# Altium PCB Flybox2_main_board.PcbDoc
Units mm, origin at the board's own origin, x right, y up, seen from the top; angles counter-clockwise.
Board outline 60 x 64 mm, 2 copper layers (Top Layer, Bottom Layer), stack 1.569 mm thick; 14 components, 38 nets, 116 pads, 1 vias.
Unrouted connection lines stored in the file: 47.
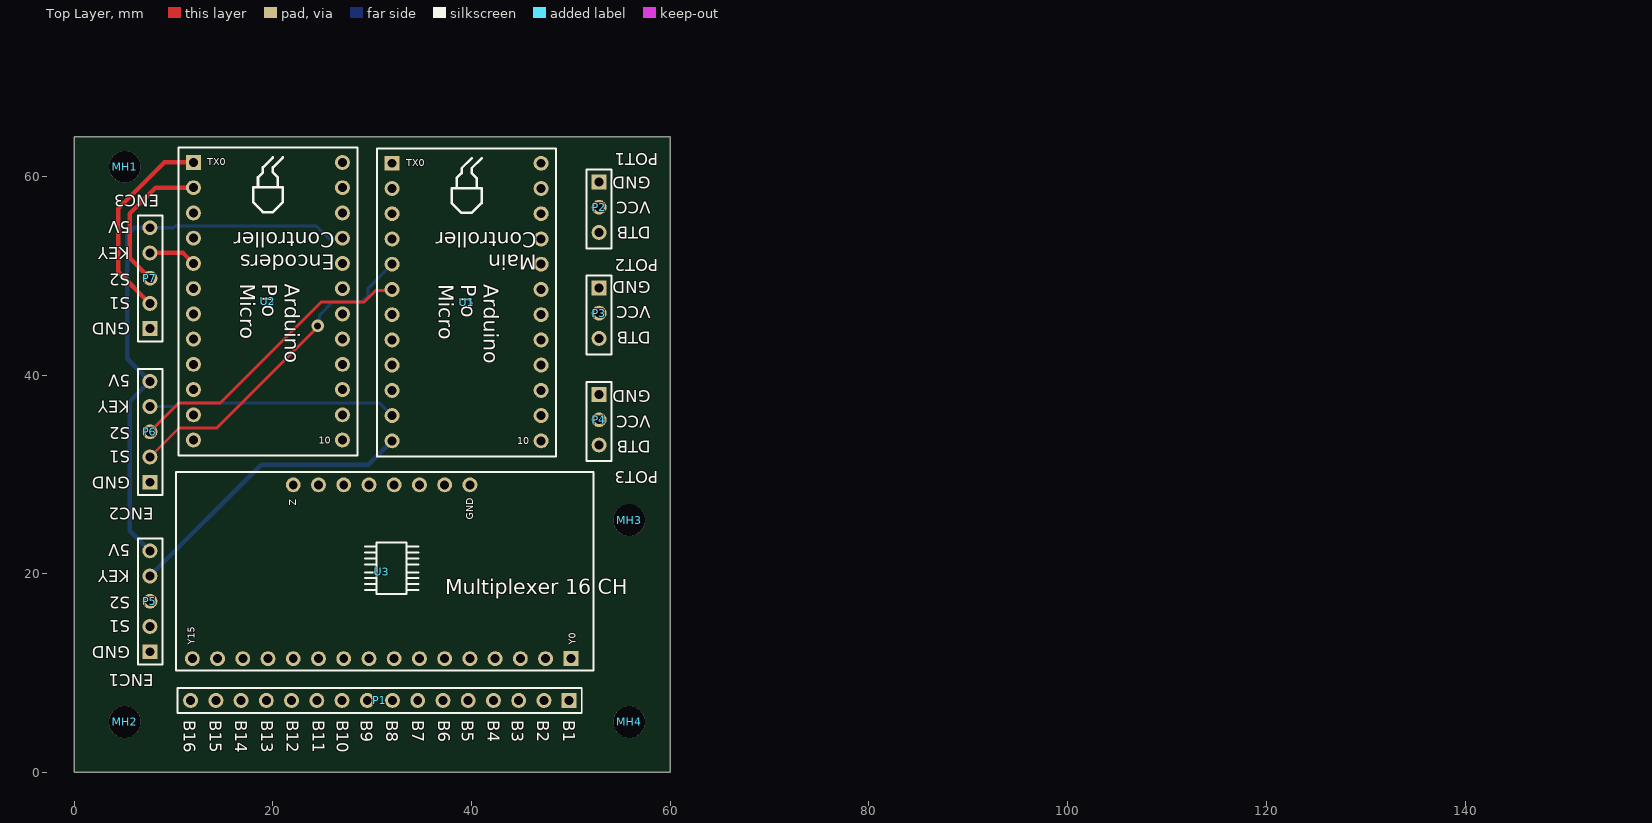
[diagram p0: Top Layer view]
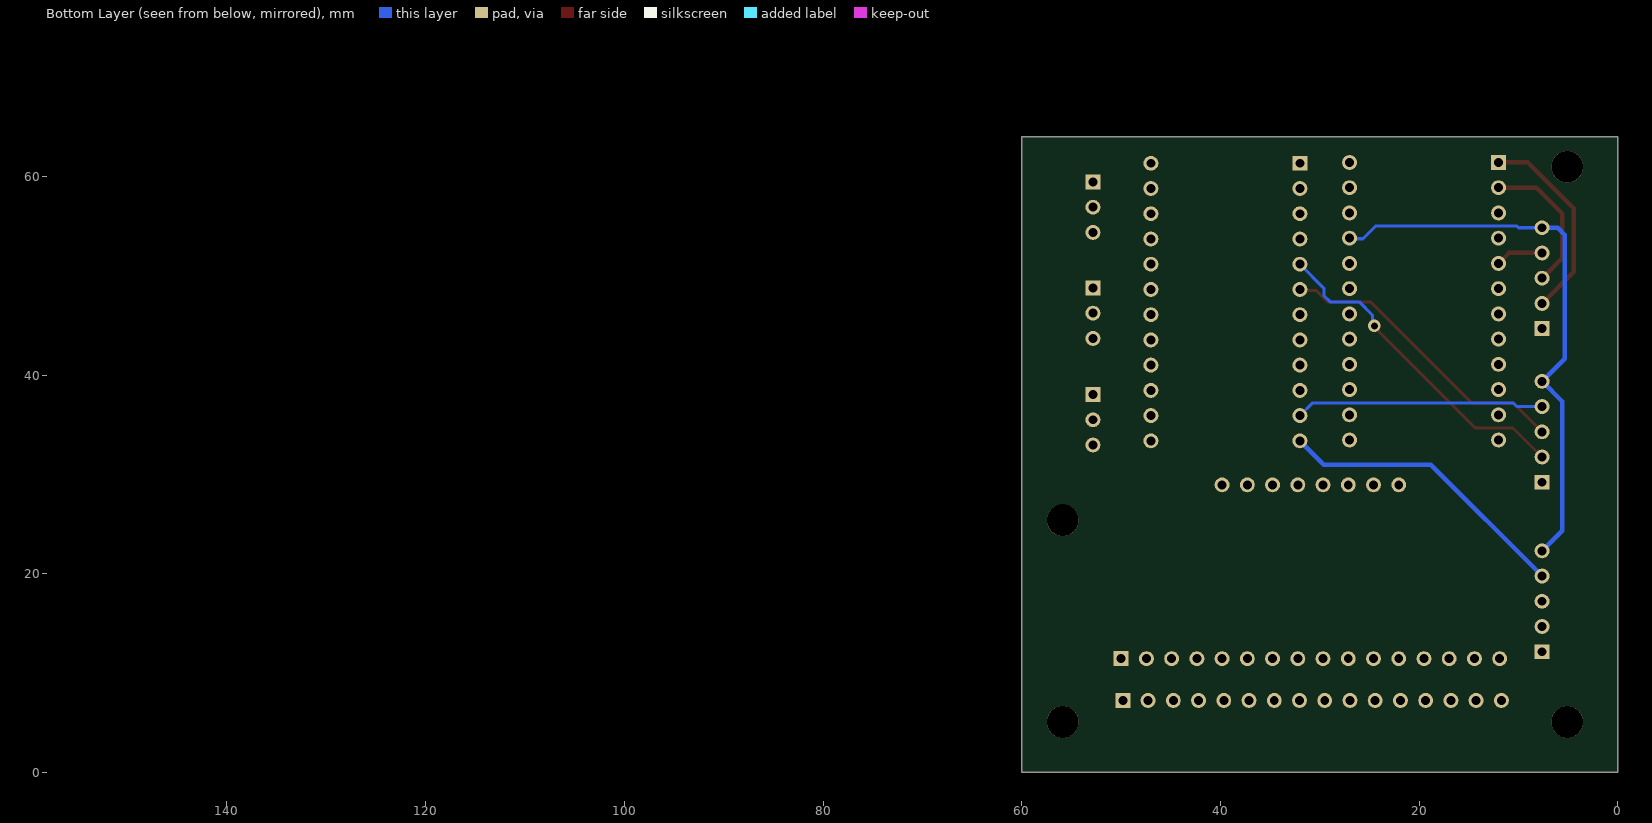
[diagram p1: Bottom Layer view, seen from below]

## Layer stack, top to bottom
Top Solder: solder mask 0.0254, SM-001, Dk 4
Top Layer: signal copper 0.035
Dielectric 1: core 1.4986, Core-043, Dk 4.3
Bottom Layer: signal copper 0.035
Bottom Solder: solder mask 0.0254, SM-001, Dk 4

## Board outline
0,0 60,0 60,64 0,64
cut-out: 25.88,127
cut-out: 27.94,124.46
cut-out: 25.4,127

## Design rules (kind name [scope] priority, off if disabled: settings)
Clearance [All] p1: gap=0.254 ignorepadtopadclearanceinfootprint=FALSE except(0: Arc-Hole Track-Hole SMDPad-Hole THPad-Hole Via-Hole Fill-Hole Poly-Hole Region-Hole Text-Hole)
PolygonConnect [All] p1: connectstyle=Relief reliefconductorwidth=0.254 reliefentries=4 polygonreliefangle="90 Angle" airgapwidth=0.254
RoutingVias [All] p1: holewidth=0.711 width=1.27 viastyle="Through Hole" minholewidth=0.711 minwidth=1.27 maxholewidth=0.711 maxwidth=1.27
SolderMaskExpansion [All] p1: expansion=0.102 istentingtop=FALSE
Width [All] p1: maxlimit=0.457 minlimit=0.305 preferedwidth=0.457 minimp=50.000000 maximp=50.000000 favimp=50.000000
30 further rules are at their usual default settings.

## Components (designator, comment, footprint, x,y, rotation, side; value= is the part's Value field where it differs from the comment)
MH1 "Mounting Hole 3.2mm Drill" MH_3.2MMD 5.08,60.96 r0 top
MH2 "Mounting Hole 3.2mm Drill" MH_3.2MMD 5.08,5.08 r0 top
MH3 "Mounting Hole 3.2mm Drill" MH_3.2MMD 55.88,25.4 r0 top
MH4 "Mounting Hole 3.2mm Drill" MH_3.2MMD 55.88,5.08 r0 top
P1 "Header_16_Keyboard" HDR1X16_Buttons 32.02,7.25 r180 top
P2 "Header3_Potentiometer" HDR1X3_Potentiometer 52.832,56.956 r270 top
P3 "Header3_Potentiometer" HDR1X3_Potentiometer 52.832,46.288 r270 top
P4 "Header3_Potentiometer" HDR1X3_Potentiometer 52.832,35.56 r270 top
P5 "Header_5_Encoder" HDR1X5_Encoder 7.62,19.75 r90 top
P6 "Header_5_Encoder" HDR1X5_Encoder 7.62,36.81 r90 top
P7 "Header_5_Encoder" HDR1X5_Encoder 7.62,52.27 r90 top
U1 "Main_Module" Arduino_Pro_Micro_Board 39.5,47.12 r270 top
U2 "Encoder_Controller" Arduino_Pro_Micro_Board 19.5,47.2 r270 top
U3 "Multiplexer_16CH" Multiplexer_16CH 38.25,18.75 r0 top

## Footprints (in the part's own frame and the unit in brackets; to place one, negate y for a bottom-side part, rotate by r counter-clockwise, add the part's x,y. Pads: shape width x height; smd on the part's side, far side on the other; paste and mask are expansions set on the pad)
Arduino_Pro_Micro_Board [mm]
  rect 1.5x1.5 hole 0.9: 1(-14.2,-7.5)
  round 1.5 hole 0.9: 2(-11.66,-7.5) 3(-9.12,-7.5) 4(-6.58,-7.5) 5(-4.04,-7.5) 6(-1.5,-7.5) 7(1.04,-7.5) 8(3.58,-7.5) 9(6.12,-7.5) 10(8.66,-7.5) 11(11.2,-7.5) 12(13.74,-7.5) 13(-14.2,7.5) 14(-11.66,7.5) 15(-9.12,7.5) 16(-6.58,7.5) 17(-4.04,7.5) 18(-1.5,7.5) 19(1.04,7.5) 20(3.58,7.5) 21(6.12,7.5) 22(8.66,7.5) 23(11.2,7.5) 24(13.74,7.5)
  silkscreen extent -15.7,-9 15.3,9, body extent -19.58,-8.77 15.01,9.01, height 12.25
HDR1X3_Potentiometer [mm]
  rect 1.5x1.5 hole 0.9: 1(-2.48,0)
  round 1.5 hole 0.9: 2(0.06,0) 3(2.6,0)
  silkscreen extent -3.75,-1.27 4.2,1.27
HDR1X5_Encoder [mm] "Header 5 pins for Encoder module"
  rect 1.5x1.5 hole 0.9: 1(-7.6,0)
  round 1.5 hole 0.9: 2(-5.06,0) 3(-2.52,0) 4(0.02,0) 5(2.56,0)
  silkscreen extent -8.87,-1.27 3.8,1.2
HDR1X16_Buttons [mm]
  rect 1.5x1.5 hole 0.9: 1(-17.8,0)
  round 1.5 hole 0.9: 2(-15.26,0) 3(-12.72,0) 4(-10.18,0) 5(-7.64,0) 6(-5.1,0) 7(-2.56,0) 8(-0.02,0) 9(2.52,0) 10(5.06,0) 11(7.6,0) 12(10.14,0) 13(12.68,0) 14(15.22,0) 15(17.76,0) 16(20.3,0)
  silkscreen extent -19.07,-1.27 21.6,1.27
MH_3.2MMD [mm]
  round 3.2 hole 3.2 unplated: 1(0,0)
Multiplexer_16CH [mm]
  rect 1.5x1.5 hole 0.9: 1(11.74,-7.3)
  round 1.5 hole 0.9: 2(9.2,-7.3) 3(6.66,-7.3) 4(4.12,-7.3) 5(1.58,-7.3) 6(-0.96,-7.3) 7(-3.5,-7.3) 8(-6.04,-7.3) 9(-8.58,-7.3) 10(-11.12,-7.3) 11(-13.66,-7.3) 12(-16.2,-7.3) 13(-18.74,-7.3) 14(-21.28,-7.3) 15(-23.82,-7.3) 16(-26.36,-7.3) 17(1.58,10.2) 18(-0.96,10.2) 19(-3.5,10.2) 20(-6.04,10.2) 21(-8.58,10.2) 22(-11.12,10.2) 23(-13.66,10.2) 24(-16.2,10.2)
  silkscreen extent -28,-8.5 14,11.5

## Part data
MH1 MH2 MH3 MH4: library part MH_3.2MMD
P5 P6 P7: "Header 5 pins to connect one encoder"
U1 U2: library part Arduino_Pro_Micro, "Arduino pro micro board"

## Via types
v1: diameter 1.27, hole 0.711, Top Layer to Bottom Layer, 1 vias

## Nets (pads, with @x,y where several pads share a name; then routed paths per layer and width w, separated by ;. In a path a pad name is that pad's centre, name@x,y a point inside that pad or via, vN(x,y) a via of type N, cw(c..) or ccw(c..) an arc to the next point about the centre after c; other vN are vias at no path point)
GND: P2.1 P3.1 P4.1 P5.1 P6.1 P7.1 U1.3 U1.4 U1.14 U2.3 U2.4 U2.14 U3.17 U3.19
NetP1_1: P1.1 U3.1
NetP1_2: P1.2 U3.2
NetP1_3: P1.3 U3.3
NetP1_4: P1.4 U3.4
NetP1_5: P1.5 U3.5
NetP1_6: P1.6 U3.6
NetP1_7: P1.7 U3.7
NetP1_8: P1.8 U3.8
NetP1_9: P1.9 U3.9
NetP1_10: P1.10 U3.10
NetP1_11: P1.11 U3.11
NetP1_12: P1.12 U3.12
NetP1_13: P1.13 U3.13
NetP1_14: P1.14 U3.14
NetP1_15: P1.15 U3.15
NetP1_16: P1.16 U3.16
NetP2_2: P2.2 P3.2 P4.2 P5.5 P6.5 P7.5 U1.16 U2.16 U3.18 | length 57
  Bottom Layer w0.305: P7.5 9.999,54.83 10.16,54.991 24.384,54.991 25.654,53.721 26.941,53.721 U2.16
  Bottom Layer w0.457: P5.5 5.588,24.342 5.588,37.338 P6.5 5.334,41.656 5.334,54.102 6.062,54.83 P7.5
NetP2_3: P2.3 U1.20
NetP3_3: P3.3 U1.19
NetP4_3: P4.3 U1.18
NetP5_2: P5.2 U1.1
NetP5_3: P5.3 U1.2
NetP5_4: P5.4 U1.12 | length 30
  Bottom Layer w0.457: P5.4 18.838,30.988 29.608,30.988 U1.12
NetP6_2: P6.2 U1.5 | length 33.5
  Top Layer w0.305: P6.2 10.541,34.671 14.351,34.671 24.511,44.831 v1(24.511,44.958)
  Bottom Layer w0.305: v1(24.511,44.958) 24.696,45.143 24.696,46.032 26.035,47.371 28.956,47.371 29.591,48.006 29.591,48.751 U1.5
NetP6_3: P6.3 U1.6 | length 30.3
  Top Layer w0.305: P6.3 10.541,37.211 14.732,37.211 24.892,47.371 29.21,47.371 30.353,48.514 31.894,48.514 U1.6
NetP6_4: P6.4 U1.11 | length 25.1
  Bottom Layer w0.305: P6.4 10.16,36.83 10.541,37.211 30.709,37.211 U1.11
NetP7_2: P7.2 U2.1 | length 20.3
  Top Layer w0.457: P7.2 4.445,50.385 4.445,56.769 9.076,61.4 U2.1
NetP7_3: P7.3 U2.2 | length 14.8
  Top Layer w0.457: P7.3 5.588,51.782 5.588,56.261 8.187,58.86 U2.2
NetP7_4: P7.4 U2.5 | length 4.9
  Top Layer w0.457: P7.4 10.95,52.29 U2.5
  Bottom Layer w0.254: U2.5@11.932,51.308 U2.5
NetU1_8: U1.8 U2.18
NetU1_9: U1.9 U2.17
NetU1_10: U1.10 U2.19
NetU1_17: U1.17 U3.24
NetU1_21: U1.21 U3.23
NetU1_22: U1.22 U3.22
NetU1_23: U1.23 U3.21
NetU1_24: U1.24 U3.20
pads on no net: MH1.1 MH2.1 MH3.1 MH4.1 U1.7 U1.13 U1.15 U2.6 U2.7 U2.8 U2.9 U2.10 U2.11 U2.12 U2.13 U2.15 U2.20 U2.21 U2.22 U2.23 U2.24

## Other copper
Top Layer:
  region: 155.378,72.5

## Silkscreen, mask and mechanical layers (free items; w line width, h text height)
Top Overlay:
  text "POT1" at 58.778,62.334 h1.2 r180
  text "ENC3" at 8.54,58.156 h1.2 r180
  text "Encoders / Controller" at 26.252,54.356 h1.5 r180
  text "Main / Controller" at 46.572,54.356 h1.5 r180
  text "POT2" at 58.778,51.666 h1.2 r180
  text "POT3" at 58.778,30.33 h1.2 r180
  text "ENC2" at 8.032,26.66 h1.2 r180
  text "ENC1" at 8.032,9.896 h1.2 r180
Outline Board:
  lines w0.254: 0,0 59.944,0 59.944,64.008 0,64.008 0,0

## Dimensions
4,64 to 60,0 on Mechanical 1
0,60 to 60,60 on Mechanical 1

## Text inside footprints (layer, text, board x,y; h text height)
P1: Top Overlay "B2" at 46.62,5.25 h1.2 r270; Top Overlay "B1" at 49.22,5.25 h1.2 r270; Top Overlay "B3" at 44.02,5.25 h1.2 r270; Top Overlay "B5" at 39.02,5.25 h1.2 r270; Top Overlay "B4" at 41.62,5.25 h1.2 r270; Top Overlay "B7" at 34.02,5.25 h1.2 r270; Top Overlay "B6" at 36.62,5.25 h1.2 r270; Top Overlay "B8" at 31.42,5.25 h1.2 r270; Top Overlay "B10" at 26.42,5.25 h1.2 r270; Top Overlay "B9" at 28.82,5.25 h1.2 r270; Top Overlay "B12" at 21.42,5.25 h1.2 r270; Top Overlay "B11" at 24.02,5.25 h1.2 r270; Top Overlay "B13" at 18.82,5.25 h1.2 r270; Top Overlay "B14" at 16.22,5.25 h1.2 r270; Top Overlay "B15" at 13.62,5.25 h1.2 r270; Top Overlay "B16" at 11.02,5.25 h1.2 r270
P2: Top Overlay "DTB" at 58.052,54.908 h1.2 r180; Top Overlay "GND" at 58.052,59.988 h1.2 r180; Top Overlay "VCC" at 58.052,57.448 h1.2 r180
P3: Top Overlay "DTB" at 58.052,44.384 h1.2 r180; Top Overlay "GND" at 58.052,49.464 h1.2 r180; Top Overlay "VCC" at 58.052,46.924 h1.2 r180
P4: Top Overlay "DTB" at 58.052,33.384 h1.2 r180; Top Overlay "GND" at 58.052,38.464 h1.2 r180; Top Overlay "VCC" at 58.052,35.924 h1.2 r180
P5: Top Overlay "GND" at 5.643,12.723 h1.2 r180; Top Overlay "S1" at 5.643,15.323 h1.2 r180; Top Overlay "S2" at 5.632,17.697 h1.2 r180; Top Overlay "KEY" at 5.613,20.33 h1.2 r180; Top Overlay "5V" at 5.65,22.962 h1.2 r180
P6: Top Overlay "GND" at 5.643,29.783 h1.2 r180; Top Overlay "S1" at 5.643,32.383 h1.2 r180; Top Overlay "S2" at 5.632,34.757 h1.2 r180; Top Overlay "KEY" at 5.613,37.39 h1.2 r180; Top Overlay "5V" at 5.65,40.022 h1.2 r180
P7: Top Overlay "GND" at 5.643,45.243 h1.2 r180; Top Overlay "S1" at 5.643,47.843 h1.2 r180; Top Overlay "S2" at 5.632,50.217 h1.2 r180; Top Overlay "KEY" at 5.613,52.85 h1.2 r180; Top Overlay "5V" at 5.65,55.482 h1.2 r180
U1: Top Overlay "TX0" at 33.4,61.02 h0.7; Top Overlay "10" at 44.6,33.02 h0.7; Top Overlay "Arduino / Pro / Micro" at 36.7,49.125 h1.5 r270
U2: Top Overlay "TX0" at 13.4,61.1 h0.7; Top Overlay "10" at 24.6,33.1 h0.7; Top Overlay "Arduino / Pro / Micro" at 16.7,49.205 h1.5 r270
U3: Top Overlay "Y0" at 50.501,12.85 h0.7 r90; Top Overlay "Z" at 22.35,26.85 h0.7 r90; Top Overlay "Y15" at 12.15,12.85 h0.7 r90; Top Overlay "GND" at 40.15,25.45 h0.7 r90; Top Overlay "Multiplexer 16 CH" at 37.333,17.95 h1.5